# Altium PCB disposeit.PcbDoc
Units mm, origin at the board's own origin, x right, y up, seen from the top; angles counter-clockwise.
Board outline 105.16 x 86.87 mm, 2 copper layers (Top Layer, Bottom Layer); 25 components, 25 nets, 102 pads, 0 vias.
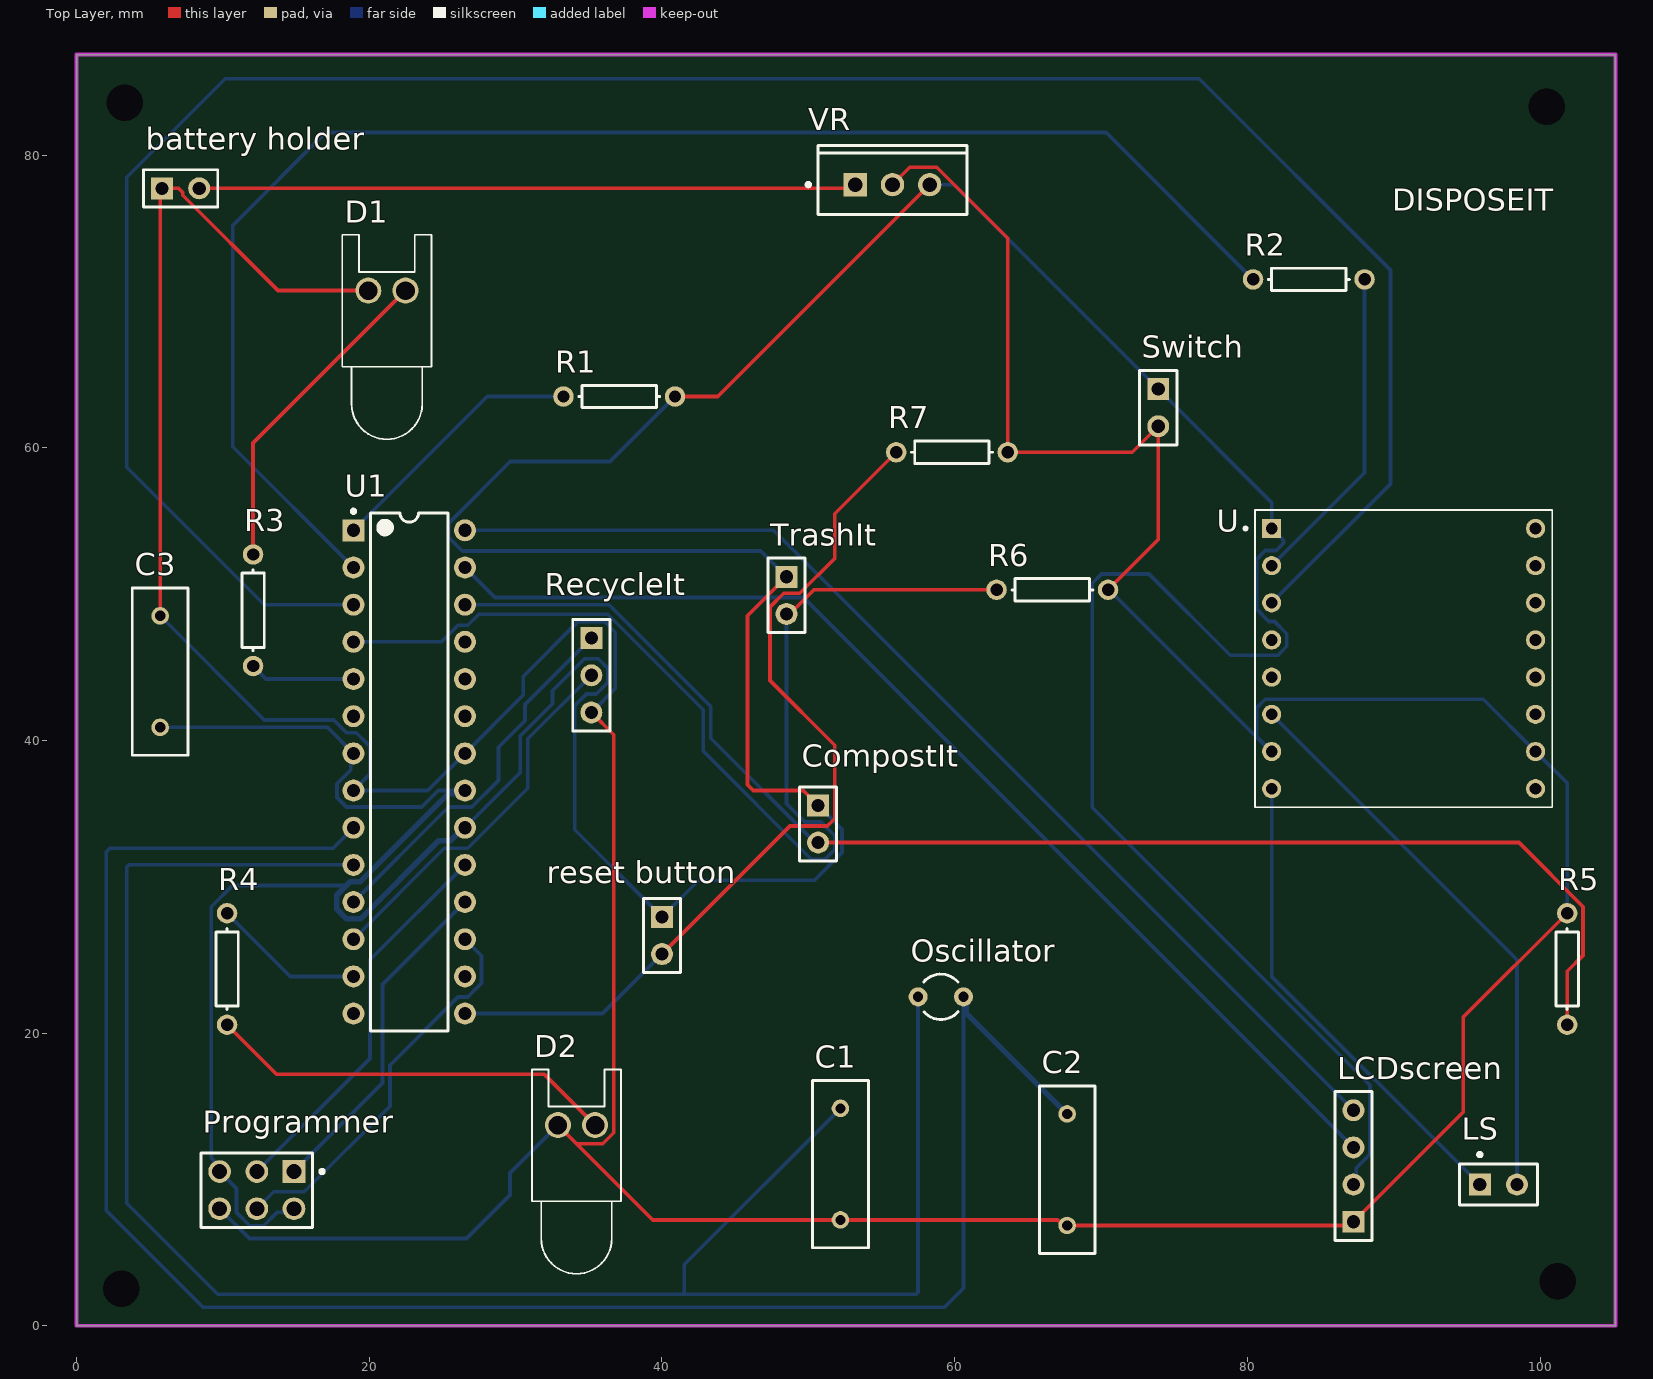
[diagram p0: Top Layer view]
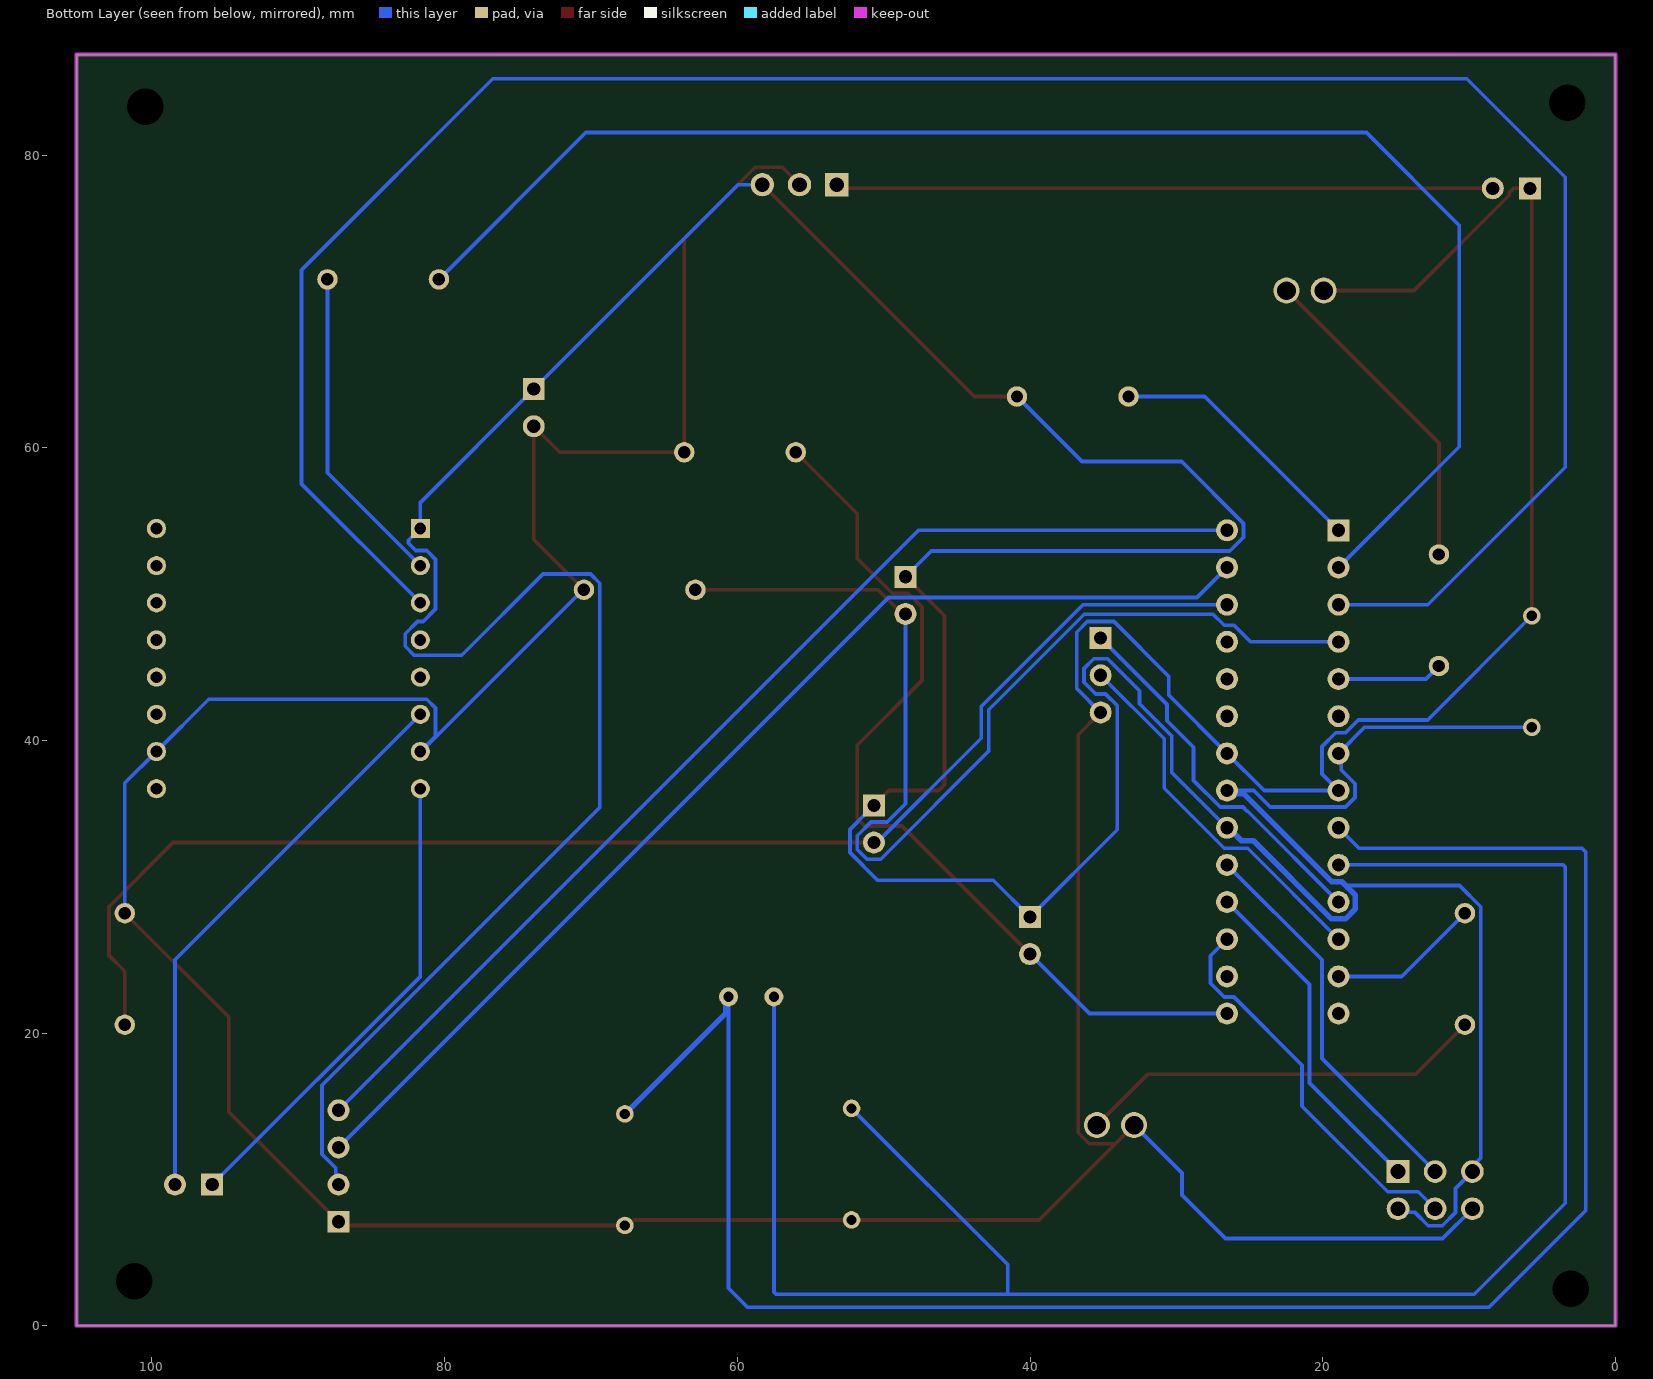
[diagram p1: Bottom Layer view, seen from below]

## Layer stack, top to bottom
Top Solder: solder mask 0.0102, Solder Resist, Dk 3.5
Top Layer: signal copper 0.0356
Dielectric 1: dielectric 0.32, FR-4, Dk 4.8
Bottom Layer: signal copper 0.0356
Bottom Solder: solder mask 0.0102, Solder Resist, Dk 3.5

## Board outline
0,0 105.156,0 105.156,86.868 0,86.868

## Design rules (kind name [scope] priority, off if disabled: settings)
BoardOutlineClearance [All] p1: gap=0.2 ignorepadtopadclearanceinfootprint=FALSE except(0.4: Arc-SplitBarrior Arc-SplitContinuation Track-SplitBarrior Track-SplitContinuation SMDPad-SplitBarrior SMDPad-SplitContinuation THPad-SplitBarrior THPad-SplitContinuation Via-SplitBarrior Via-SplitContinuation Fill-SplitBarrior Fill-SplitContinuation Poly-SplitBarrior Poly-SplitContinuation Region-SplitBarrior Region-SplitContinuation Text-SplitBarrior Text-SplitContinuation)
Clearance "Clearance Bottom Layer" [OnLayer('Bottom Layer')] p1: gap=0.203 ignorepadtopadclearanceinfootprint=TRUE except(0.254: Arc-Text Track-Text SMDPad-Text THPad-Text Via-Text Fill-Text Poly-Text Region-Text Text-Text)
Clearance "Clearance Top Layer" [OnLayer('Top Layer')] p2: gap=0.203 ignorepadtopadclearanceinfootprint=TRUE except(0.254: Arc-Text Track-Text SMDPad-Text THPad-Text Via-Text Fill-Text Poly-Text Region-Text Text-Text)
Clearance [All] p3: gap=0.2 ignorepadtopadclearanceinfootprint=FALSE except(0.089: Arc-Arc Arc-Track Arc-SMDPad Track-Track Track-SMDPad SMDPad-SMDPad; 0.127: Arc-Via Track-Via SMDPad-Via THPad-Via Via-Via; 0.254: Arc-Text Track-Text SMDPad-Text THPad-Text Via-Text Fill-Text Poly-Text Region-Text Text-Text)
HoleSize [All] p1: absolutevalues=TRUE maxlimit=6.3 minlimit=0.2 maxpercent=80.000 minpercent=20.000
MinimumAnnularRing [All] p1: minimumring=0.076
MinimumSolderMaskSliver [All] p1: minsoldermaskwidth=0.1
PolygonConnect PolygonConnect_1 [All] p1: thpad.connectstyle=Relief thpad.reliefconductorwidth=0.508 thpad.reliefentries=4 thpad.polygonreliefangle="90 Angle" thpad.airgapwidth=0.254 smdpad.connectstyle=Relief smdpad.reliefconductorwidth=0.508 smdpad.reliefentries=4 smdpad.polygonreliefangle="90 Angle" smdpad.airgapwidth=0.254 via.connectstyle=Direct via.reliefconductorwidth=0.508 via.reliefentries=4 via.polygonreliefangle="90 Angle" via.airgapwidth=0.254
RoutingCorners [All] p1: cornerstyle=Round minsetback=2.54 maxsetback=2.54
RoutingVias [All] p1: holewidth=0.5 width=1 viastyle="Through Hole" minholewidth=0.2 minwidth=0.45 maxholewidth=1 maxwidth=2
SilkToSilkClearance [All] p1: silktosilkclearance=0.1
SilkToSolderMaskClearance [IsPad] p1: minsilkscreentomaskgap=0.1 clearancetoexposedcopper=TRUE
SolderMaskExpansion [All] p1: expansion=0.102 istentingtop=FALSE
Width [All] p1: maxlimit=2.54 minlimit=0.089 preferedwidth=0.381
25 further rules are at their usual default settings.

## Components (designator, comment, footprint, x,y, rotation, side; value= is the part's Value field where it differs from the comment)
"battery holder" "Header 2" HDR1X2 5.842,77.724 r0 top
C1 "Cap" RAD-0.3 52.197,11.049 r90 top value=22pF
C2 "Cap" RAD-0.3 67.691,10.668 r90 top value=22pF
C3 "Cap" RAD-0.3 5.715,44.704 r270 top value=0.1uF
CompostIt "Header 2" HDR1X2 50.673,35.56 r270 top
D1 "LED0" LED-0 21.209,70.739 r0 top
D2 "LED0" LED-0 34.163,13.716 r0 top
LCDscreen "Header 4" HDR1X4 87.249,7.112 r90 top
LS "Speaker" PIN2 95.885,9.652 r0 top
Oscillator "XTAL" R38 59.055,22.479 r90 top
Programmer "TSW-103-08-L-D" SMTC-TSW-103-08-L-D_V 12.319,9.271 r180 top
R1 "Res1" AXIAL-0.3 37.084,63.5 r0 top value=10K
R2 "Res1" AXIAL-0.3 84.201,71.501 r0 top value=1K
R3 "Res1" AXIAL-0.3 12.065,48.895 r90 top value=340
R4 "Res1" AXIAL-0.3 10.287,24.384 r270 top value=340
R5 "Res1" AXIAL-0.3 101.854,24.384 r270 top value=3.3k
R6 "Res1" AXIAL-0.3 66.675,50.292 r180 top value=10k
R7 "Res1" AXIAL-0.3 59.817,59.69 r180 top value=3.3k
RecycleIt "Header 3" HDR1X3 35.179,46.99 r270 top
"reset button" "Header 2" HDR1X2 40.005,27.94 r270 top
Switch "Header 2" HDR1X2 73.914,64.008 r270 top
TrashIt "Header 2" HDR1X2 48.514,51.181 r270 top
U "DFR0299" MODULE_DFR0299 90.678,45.593 r0 top
U1 "ATmega328-PU" 28P3 22.733,37.846 r0 top
VR "LM7805CT" FAIR-TO-220-3 55.753,77.978 r90 top

## Footprints (in the part's own frame and the unit in brackets; to place one, negate y for a bottom-side part, rotate by r counter-clockwise, add the part's x,y. Pads: shape width x height; smd on the part's side, far side on the other; paste and mask are expansions set on the pad)
28P3 [mm] "28-Pin Plastic Dual In-Line Package (PDIP)"
  rect 1.5x1.5 hole 0.9: 1(-3.81,16.51)
  round 1.5 hole 0.9: 2(-3.81,13.97) 3(-3.81,11.43) 4(-3.81,8.89) 5(-3.81,6.35) 6(-3.81,3.81) 7(-3.81,1.27) 8(-3.81,-1.27) 9(-3.81,-3.81) 10(-3.81,-6.35) 11(-3.81,-8.89) 12(-3.81,-11.43) 13(-3.81,-13.97) 14(-3.81,-16.51) 15(3.81,-16.51) 16(3.81,-13.97) 17(3.81,-11.43) 18(3.81,-8.89) 19(3.81,-6.35) 20(3.81,-3.81) 21(3.81,-1.27) 22(3.81,1.27) 23(3.81,3.81) 24(3.81,6.35) 25(3.81,8.89) 26(3.81,11.43) 27(3.81,13.97) 28(3.81,16.51)
  silkscreen extent -3.93,-17.7 2.65,17.93, body extent -3.6,-17.65 3.6,17.65, height 4.58
AXIAL-0.3 [mm] "Axial Device, Thru-Hole; 2 Leads; 0.3 in Pin Spacing"
  round 1.4 hole 0.85: 1(-3.81,0) 2(3.81,0)
  silkscreen extent -2.77,-0.76 2.77,0.76
FAIR-TO-220-3 [mm] "FM, 3-Leads, Body 10.2x4.7mm, Pitch 2.54mm"
  rect 1.6x1.6 hole 1: 1(0,2.54)
  round 1.6 hole 1: 2(0,0) 3(0,-2.54)
  silkscreen extent -2.04,-5.1 2.66,5.87, body extent -2.04,-5.1 2.66,5.1, height 18.95
HDR1X2 [mm] "Connector; Header; 2 Position"
  rect 1.5x1.5 hole 0.9: 1(0,0)
  round 1.5 hole 0.9: 2(2.54,0)
  silkscreen extent -1.27,-1.27 3.81,1.27
HDR1X3 [mm] "Connector; Header; 3 Position"
  rect 1.5x1.5 hole 0.9: 1(0,0)
  round 1.5 hole 0.9: 2(2.54,0) 3(5.08,0)
  silkscreen extent -1.27,-1.27 6.35,1.27
HDR1X4 [mm] "Connector; Header; 4 Position"
  rect 1.5x1.5 hole 0.9: 1(0,0)
  round 1.5 hole 0.9: 2(2.54,0) 3(5.08,0) 4(7.62,0)
  silkscreen extent -1.27,-1.27 8.89,1.27
LED-0 [mil] "LED; 2 Leads"
  round 70 hole 50: 1(50,0) 2(-50,0)
  silkscreen extent -120,-400 120,150
MODULE_DFR0299 [mm]
  rect 1.308x1.308 hole 0.8: 1(-9.017,8.89)
  round 1.308 hole 0.8: 2(-9.017,6.35) 3(-9.017,3.81) 4(-9.017,1.27) 5(-9.017,-1.27) 6(-9.017,-3.81) 7(-9.017,-6.35) 8(-9.017,-8.89) 9(9.017,-8.89) 10(9.017,-6.35) 11(9.017,-3.81) 12(9.017,-1.27) 13(9.017,1.27) 14(9.017,3.81) 15(9.017,6.35) 16(9.017,8.89)
  silkscreen extent -10.9,-10.16 10.16,10.16
PIN2 [mm] "Photosensitive Diode; 2 Leads"
  rect 1.5x1.5 hole 0.9: 1(0,0)
  round 1.5 hole 0.9: 2(2.54,0)
  silkscreen extent -1.4,-1.4 3.94,2.17
R38 [mm] "Crystal, Thru-Hole; 2 Leads; Body 3.1 x 8.2 mm (Dia.xH)"
  round 1.3 hole 0.7: 1(0,1.55) 2(0,-1.55)
  silkscreen extent -1.55,-1.19 1.55,1.17
RAD-0.3 [mm] "Radial Cap, Thru-Hole; 2 Leads; 0.3 in Pin Spacing"
  round 1.2 hole 0.7: 1(-3.81,0) 2(3.81,0)
  silkscreen extent -5.71,-1.91 5.71,1.91
SMTC-TSW-103-08-L-D_V [mm] "CONN, 6-Leads, Body 7.62x5.08mm, Pitch 2.54mm"
  rect 1.55x1.55 hole 1.02: 1(-2.54,-1.27)
  round 1.55 hole 1.02: 2(-2.54,1.27) 3(0,-1.27) 4(0,1.27) 5(2.54,-1.27) 6(2.54,1.27)
  silkscreen extent -4.59,-2.54 3.81,2.54, body extent -3.81,-2.54 3.81,2.54, height 8.38

## Part data
"battery holder" CompostIt "reset button" Switch TrashIt: "Header, 2-Pin", LatestRevisionDate=17-Jul-2002, LatestRevisionNote="Re-released for DXP Platform.", Publisher="Altium Limited"
C1 C2 C3: "Capacitor", LatestRevisionDate=17-Jul-2002, LatestRevisionNote="Re-released for DXP Platform.", PackageDescription="Radial Cap, Thru-Hole; 2 Leads; 0.3 in Pin Spacing", PackageReference=RAD-0.3, Published=8-Jun-2000, Publisher="Altium Limited"
D1 D2: "Typical INFRARED GaAs LED", LatestRevisionDate=08-Jul-2005, LatestRevisionNote="Mech Layer 1 removed.", PackageDescription="LED; 2 Leads", PackageReference=LED-0, Published=8-Jun-2000, Publisher="Altium Limited"
LCDscreen: "Header, 4-Pin", LatestRevisionDate=17-Jul-2002, LatestRevisionNote="Re-released for DXP Platform.", Publisher="Altium Limited"
LS: "Loudspeaker", LatestRevisionDate=17-Jul-2002, LatestRevisionNote="Re-released for DXP Platform.", PackageReference=PIN2, Published=24-Mar-1999, Publisher="Altium Limited"
Oscillator: "Crystal Oscillator", LatestRevisionDate=17-Jul-2002, LatestRevisionNote="Re-released for DXP Platform.", PackageDescription="Crystal, Thru-Hole; 2 Leads; Body 3.1 x 8.2 mm (Dia.xH)", PackageReference=R38, Published=8-Jun-2000, Publisher="Altium Limited"
Programmer: library part CMP-1024-00336-5, "Male Header, Pitch 2.54 mm, 2 x 3 Position, Height 8.38 mm, Tail Length 5.08 mm, -55 to 125 degC, RoHS, Bulk", Manufacturer=Samtec, Max Operating Temperature="125 degC", Min Operating Temperature="-55 degC", ComponentLink1Description="Manufacturer URL", ComponentLink1URL=http://www.samtec.com/, ComponentLink2Description=Datasheet, ComponentLink2URL=https://datasheet.ciiva.com/25618/0900766b81154476-25618436.pdf, ComponentLink3Description="Package Specification", ComponentLink3URL=http://suddendocs.samtec.com/prints/tsw-xxx-xx-x-x-xx-xxx-footprint.pdf, DatasheetVersion=04/2012, Lead Pitch="2.54 mm", Mount="Through Hole", Mounting Technology="Through Hole", PackageDescription="Male Header, Pitch 2.54 mm, 2 x 3 Position, Height 8.38 mm, Tail Length 5.08 mm", PackageReference=TSW-103-08-L-D, RoHSCompliant=true
R1 R2 R3 R4 R5 R6 R7: "Resistor", LatestRevisionDate=17-Jul-2002, LatestRevisionNote="Re-released for DXP Platform.", PackageDescription="Axial Device, Thru-Hole; 2 Leads; 0.3 in Pin Spacing", PackageReference=AXIAL-0.3, Published=8-Jun-2000, Publisher="Altium Limited"
RecycleIt: "Header, 3-Pin", LatestRevisionDate=17-Jul-2002, LatestRevisionNote="Re-released for DXP Platform.", Publisher="Altium Limited"
U: "MP3 Player Audio Arduino Platform Evaluation Expansion Board", Package=None, Availability=Unavailable, MF=DFRobot, MP=DFR0299, Price=None, SnapEDA_Link=https://www.snapeda.com/parts/DFR0299/DFRobot/view-part/588059/?ref=snap
U1: library part CMP-0095-00015-2, "8-bit AVR Microcontroller, 32KB Flash, 1KB EEPROM, 2KB SRAM, 28-pin PDIP, Industrial Grade (-40°C to 85°C)", ComponentLink1Description="Manufacturer URL", ComponentLink1URL=http://www.atmel.com/, ComponentLink2Description="ATmega48A/48PA/88A/88PA/168A/168PA/328/328P Datasheet", ComponentLink2URL=http://www.atmel.com/dyn/resources/prod_documents/8271.pdf, ComponentLink3Description="ATmega48A/48PA/88A/88PA/168A/168PA/328/328P Summary", ComponentLink3URL=http://www.atmel.com/dyn/resources/prod_documents/8271S.pdf, DatasheetVersion="revD, May-2011", PackageDescription="28-lead (0.300\"/7.62mm Wide) Plastic Dual Inline Package (PDIP)", PackageReference=28P3, PackageVersion="revB, Sep-2001", RevisionNote="DatasheetVersion updated. URLs added."
VR: library part CMP-2000-04938-1, "Positive Voltage Regulator, 5 V, 1 A, -40 to 125 degC, 3-Pin TO-220, RoHS, Tube", Manufacturer=FairchildSemiconductor, Maximum Input Voltage=35V, Maximum Output Current=2.2(Typ)A, Maximum Quiescent Current=8mA, Operating Temperature=-40to125degC, Output Voltage=5V, Package=3TO-220AB, Package Description="3-Pin Through Hole Device, Body 10 x 4.5 mm, Pitch 2.54 mm", Package Reference=TO-220, Typical Dropout Voltage @ Current=2@1AV, Accuracy=±4%, Category=LinearRegulator, Datasheet URL=https://datasheet.ciiva.com/26904/lm7805ct-26904988.pdf, Datasheet Version=Aug-12, Line Regulation=100mV, Load Regulation=100mV, Manufacturer URL=https://www.fairchildsemi.com/, Mounting=ThroughHole, Number of Outputs=1, Output Type=Fixed, Package URL=https://www.fairchildsemi.com/package-drawings/TO/TO220B03.pdf, Packaging=Rail/Tube, Polarity=Positive, Rad Hard=No, Type=Linear

## Free pads (board coordinates)
  round 1.27 hole 2.5: 2(3.302,83.566) 3(100.457,83.312) 4(101.219,3.048) 5(3.048,2.54)

## Nets (pads, with @x,y where several pads share a name; then routed paths per layer and width w, separated by ;. In a path a pad name is that pad's centre, name@x,y a point inside that pad or via, vN(x,y) a via of type N, cw(c..) or ccw(c..) an arc to the next point about the centre after c; other vN are vias at no path point)
MISO: Programmer.1 U1.18 | length 23.3
  Bottom Layer w0.254: Programmer.1 20.906,16.588 20.906,23.319 U1.18
MOSI: Programmer.4 U1.17 | length 26.9
  Bottom Layer w0.254: Programmer.4 13.475,9.157 15.564,9.157 21.414,15.007 21.414,17.806 26.075,22.467 26.733,22.467 27.674,23.408 27.674,25.285 U1.17
"Netbattery holder_1": "battery holder.1" C1.1 C2.1 C3.1 D1.2 D2.2 LCDscreen.1 Programmer.6 R5.1 R6.1 R7.1 RecycleIt.3 Switch.2 U1.8 U1.22 U.7 U.10 VR.2 | length 343
  Top Layer w0.254: C3.1 5.715,77.597 5.842,77.724 6.973,77.724 7.251,77.446 7.251,77.256 13.768,70.739 D1.2 ; D2.2 34.163,12.446 ; RecycleIt.3 36.703,40.386 36.703,13.19 35.959,12.446 34.163,12.446 ; VR.2 56.934,79.159 58.782,79.159 63.627,74.314 R7.1 72.136,59.69 Switch.2 73.914,53.721 R6.1 ; R5.1 94.753,21.093 94.753,14.616 LCDscreen.1 86.995,6.858 C2.1 67.435,6.858 67.054,7.239 C1.1 39.37,7.239 34.163,12.446
  Bottom Layer w0.254: C3.1 12.827,41.402 17.578,41.402 18.455,40.525 19.113,40.525 20.054,39.584 20.054,37.707 U1.8 24.003,36.576 U1.22 30.526,43.099 30.526,44.376 34.271,48.121 36.087,48.121 36.818,47.39 36.818,43.549 RecycleIt.3 ; Programmer.6 11.811,5.969 26.648,5.969 29.625,8.946 29.625,10.448 D2.2 ; R6.1 70.549,50.292 81.597,39.243 U.7 80.626,40.278 80.626,42.212 81.232,42.818 96.12,42.818 U.10 101.854,37.084 R5.1
"Netbattery holder_2": "battery holder.2" VR.1 | length 44.9
  Top Layer w0.254: 8.382,77.724 52.959,77.724 VR.1
NetC1_2: C1.2 Oscillator.1 U1.10 | length 132.5
  Bottom Layer w0.254: U1.10 3.578,31.496 3.429,31.347 3.429,8.382 9.652,2.159 41.529,2.159 ; C1.2 41.529,4.191 41.529,2.159 ; Oscillator.1 57.505,2.308 57.356,2.159 41.529,2.159
NetC2_2: C2.2 Oscillator.2 U1.9 | length 134.8
  Bottom Layer w0.254: U1.9 17.526,32.639 2.286,32.639 2.032,32.385 2.032,7.874 8.636,1.27 59.309,1.27 60.605,2.566 Oscillator.2
  Bottom Layer w0.381: Oscillator.2 60.781,22.303 60.781,21.388 C2.2
NetCompostIt_2: CompostIt.2 R5.2 U1.26 | length 95.3
  Top Layer w0.254: CompostIt.2 98.557,33.02 102.935,28.642 102.935,25.303 101.854,24.222 R5.2
  Bottom Layer w0.254: U1.26@26.543,49.022 U1.26 26.555,49.264 36.381,49.264 43.333,42.312 43.333,40.143 50.456,33.02 CompostIt.2 50.673,33.147 CompostIt.2@50.546,33.274
NetD1_1: D1.1 R3.2 | length 22.3
  Top Layer w0.254: R3.2 12.065,60.325 D1.1
NetD2_1: D2.1 R4.2 | length 28
  Top Layer w0.254: R4.2 13.68,17.181 31.968,17.181 D2.1
NetLCDscreen_3: LCDscreen.3 U1.27 | length 77.1
  Bottom Layer w0.254: U1.27 28.587,49.772 49.669,49.772 LCDscreen.3
NetLCDscreen_4: LCDscreen.4 U1.28 | length 77.1
  Bottom Layer w0.254: U1.28 47.625,54.356 LCDscreen.4
NetLS_1: LS.1 U.8 | length 32.9
  Bottom Layer w0.254: U.8 81.661,23.876 LS.1
NetLS_2: LS.2 U.6 | length 39.1
  Bottom Layer w0.254: U.6 98.425,25.019 LS.2
NetR1_1: R1.1 U1.1 | length 18.1
  Bottom Layer w0.254: U1.1 28.067,63.5 R1.1
NetR2_1: R2.1 U1.2 | length 103.3
  Bottom Layer w0.254: U1.2 10.668,60.071 10.668,75.184 17.018,81.534 70.358,81.534 R2.1
NetR2_2: R2.2 U.2 | length 22.2
  Bottom Layer w0.254: U.2 88.011,58.293 R2.2
NetR3_1: R3.1 U1.5 | length 7.2
  Bottom Layer w0.254: R3.1 12.954,44.196 U1.5
NetR4_1: R4.1 U1.13 | length 10.4
  Bottom Layer w0.254: R4.1 14.605,23.876 U1.13
NetR6_2: R6.2 TrashIt.2 U1.4 | length 75.7
  Top Layer w0.254: TrashIt.2 48.731,48.641 50.382,50.292 R6.2
  Bottom Layer w0.254: U1.4 24.944,46.736 26.075,47.867 26.733,47.867 27.495,48.629 36.297,48.629 42.825,42.102 42.825,39.269 50.205,31.889 51.141,31.889 51.804,32.552 51.804,33.488 50.863,34.429 49.765,34.429 48.514,35.68 TrashIt.2
NetR7_2: "reset button.2" R7.2 U1.15 | length 61.9
  Top Layer w0.254: 40.005,25.4 48.756,34.151 51.303,34.151 51.804,34.652 51.804,39.67 47.383,44.091 47.383,49.109 48.324,50.05 49.422,50.05 51.804,52.432 51.804,55.487 R7.2
  Bottom Layer w0.254: U1.15 35.941,21.336 40.005,25.4
NetRecycleIt_1: RecycleIt.1 U1.11 | length 25.7
  Bottom Layer w0.254: U1.11 25.134,35.167 25.178,35.167 25.456,35.445 27.011,35.445 28.828,37.262 28.828,39.536 30.645,41.353 30.645,42.456 RecycleIt.1
NetRecycleIt_2: RecycleIt.2 U1.12 | length 25.7
  Bottom Layer w0.254: U1.12 25.134,32.627 26.733,32.627 30.837,36.731 30.837,40.108 RecycleIt.2
NetU1_3: U1.3 U.3 | length 159.9
  Bottom Layer w0.254: U1.3 12.827,49.276 3.429,58.674 3.429,78.486 10.16,85.217 76.708,85.217 89.789,72.136 89.789,57.531 U.3
Reset: "reset button.1" C3.2 CompostIt.1 LCDscreen.2 Programmer.2 Programmer.5 R1.2 Switch.1 TrashIt.1 U1.7 U1.20 U1.21 U.1 VR.3 | length 342.9
  Top Layer w0.254: R1.2 43.815,63.5 VR.3 ; TrashIt.1 45.847,48.514 45.847,36.979 46.245,36.581 49.652,36.581 CompostIt.1
  Bottom Layer w0.254: C3.2 17.145,40.894 U1.7 18.733,38.926 18.733,37.985 17.792,37.044 17.792,36.108 18.455,35.445 23.59,35.445 24.721,36.576 U1.21 ; Programmer.2 14.611,7.753 13.706,7.753 12.798,6.845 11.84,6.845 10.935,7.75 10.935,9.385 Programmer.5 9.779,10.892 9.206,11.465 9.206,28.642 10.651,30.087 18.437,30.087 ; U1.20 30.329,37.822 30.329,40.318 32.52,42.509 32.52,43.39 34.711,45.581 35.647,45.581 36.31,44.918 36.31,43.982 35.508,43.18 34.85,43.18 34.048,42.378 34.048,33.897 40.005,27.94 42.517,30.452 50.423,30.452 52.312,32.341 52.312,33.921 51.153,35.08 50.05,35.08 50.53,35.56 CompostIt.1 ; R1.2 36.447,59.053 29.64,59.053 25.412,54.824 25.412,53.888 26.353,52.947 46.748,52.947 TrashIt.1 ; VR.3 59.944,77.978 Switch.1 81.661,56.261 U.1 82.467,53.677 82.467,53.467 81.978,52.978 81.232,52.978 80.626,52.372 80.626,48.974 81.467,48.133 81.855,48.133 82.696,47.292 82.696,46.434 82.09,45.828 78.836,45.828 73.291,51.373 70.037,51.373 69.404,50.74 69.404,35.415 88.38,16.439 88.38,11.724 87.439,10.783 87.439,9.842 LCDscreen.2
  Bottom Layer w0.381: U1.20 26.451,34.036 25.562,33.148 24.732,33.148 19.397,27.812 18.449,27.812 17.779,28.482 17.779,29.43 18.437,30.087 18.702,30.352 19.397,30.352 25.406,36.362 26.329,36.362 U1.21
SCK: Programmer.3 U1.19 | length 26.8
  Bottom Layer w0.254: Programmer.3 20.054,18.276 20.054,25.007 U1.19
pads on no net: U1.6 U1.14 U1.16 U1.23 U1.24 U1.25 U.4 U.5 U.9 U.11 U.12 U.13 U.14 U.15 U.16

## Keep-outs
Keep-Out Layer:
  the board outline again, w0.254

## Silkscreen, mask and mechanical layers (free items; w line width, h text height)
Top Overlay:
  text "DISPOSEIT" at 89.916,76.2 h1.52
Mechanical 1:
  the board outline again, w1.2